# EAGLE board Carte_Mere_V2 (EAGLE 9.5.2)
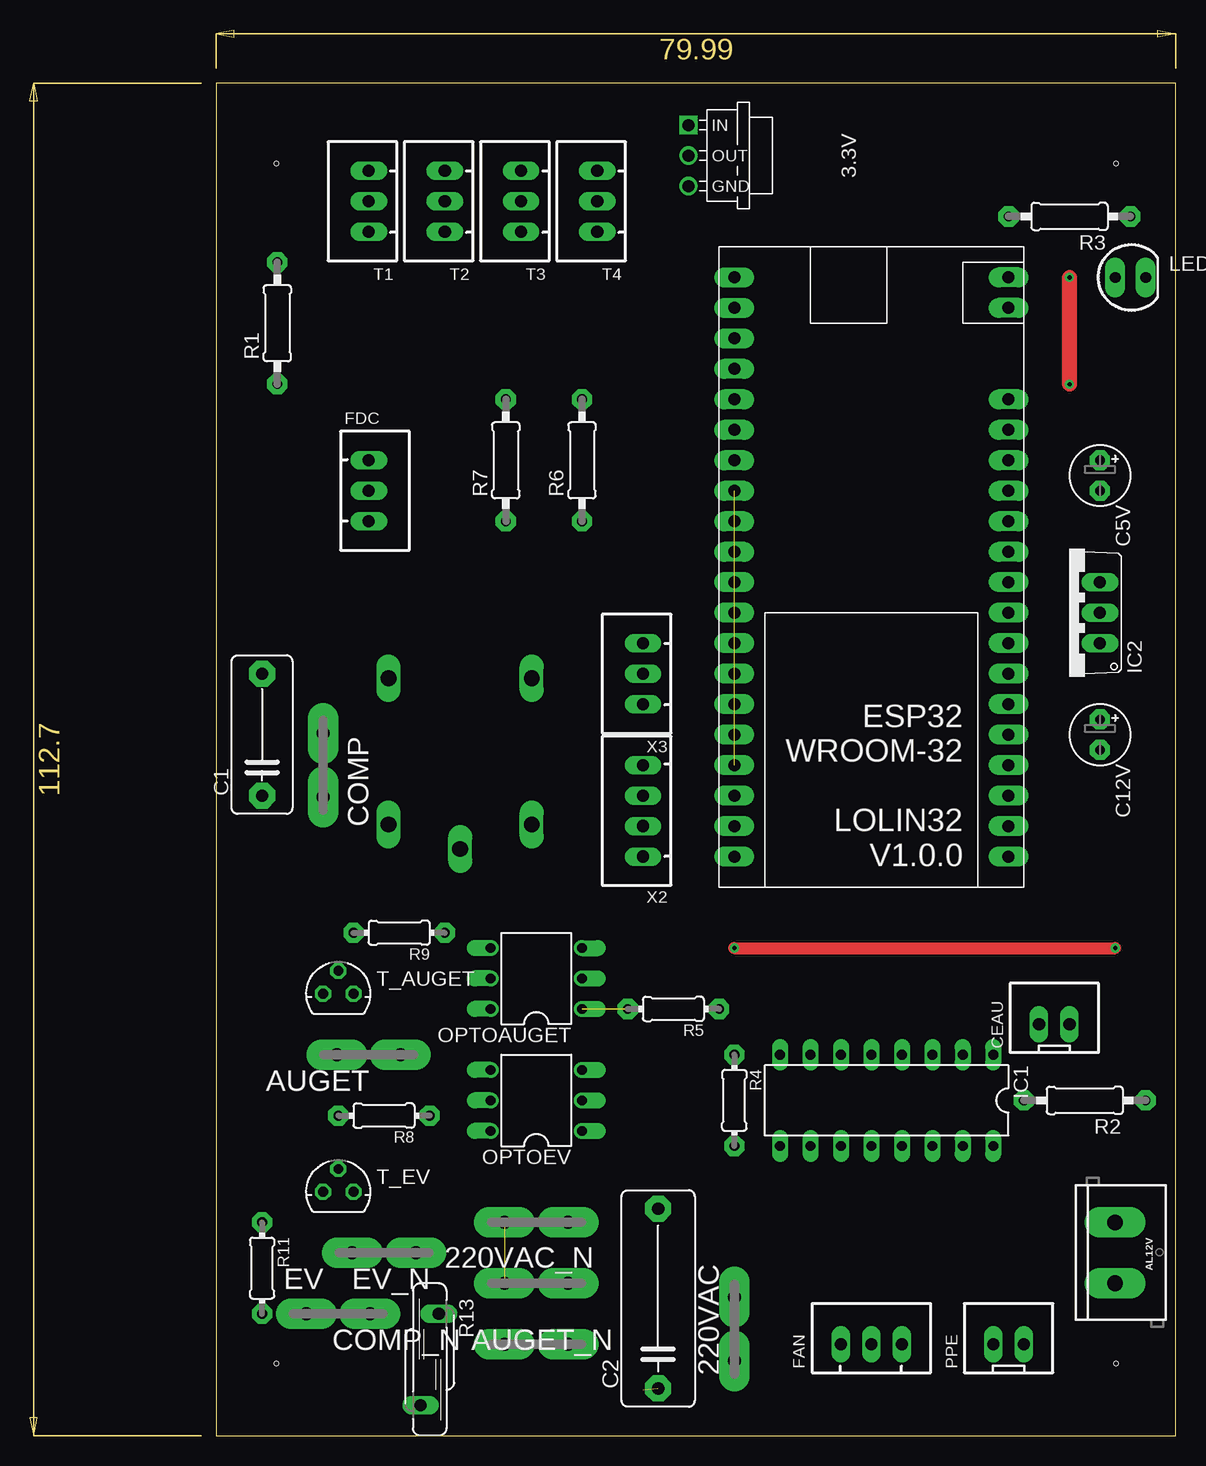
[diagram p0: board, top side]
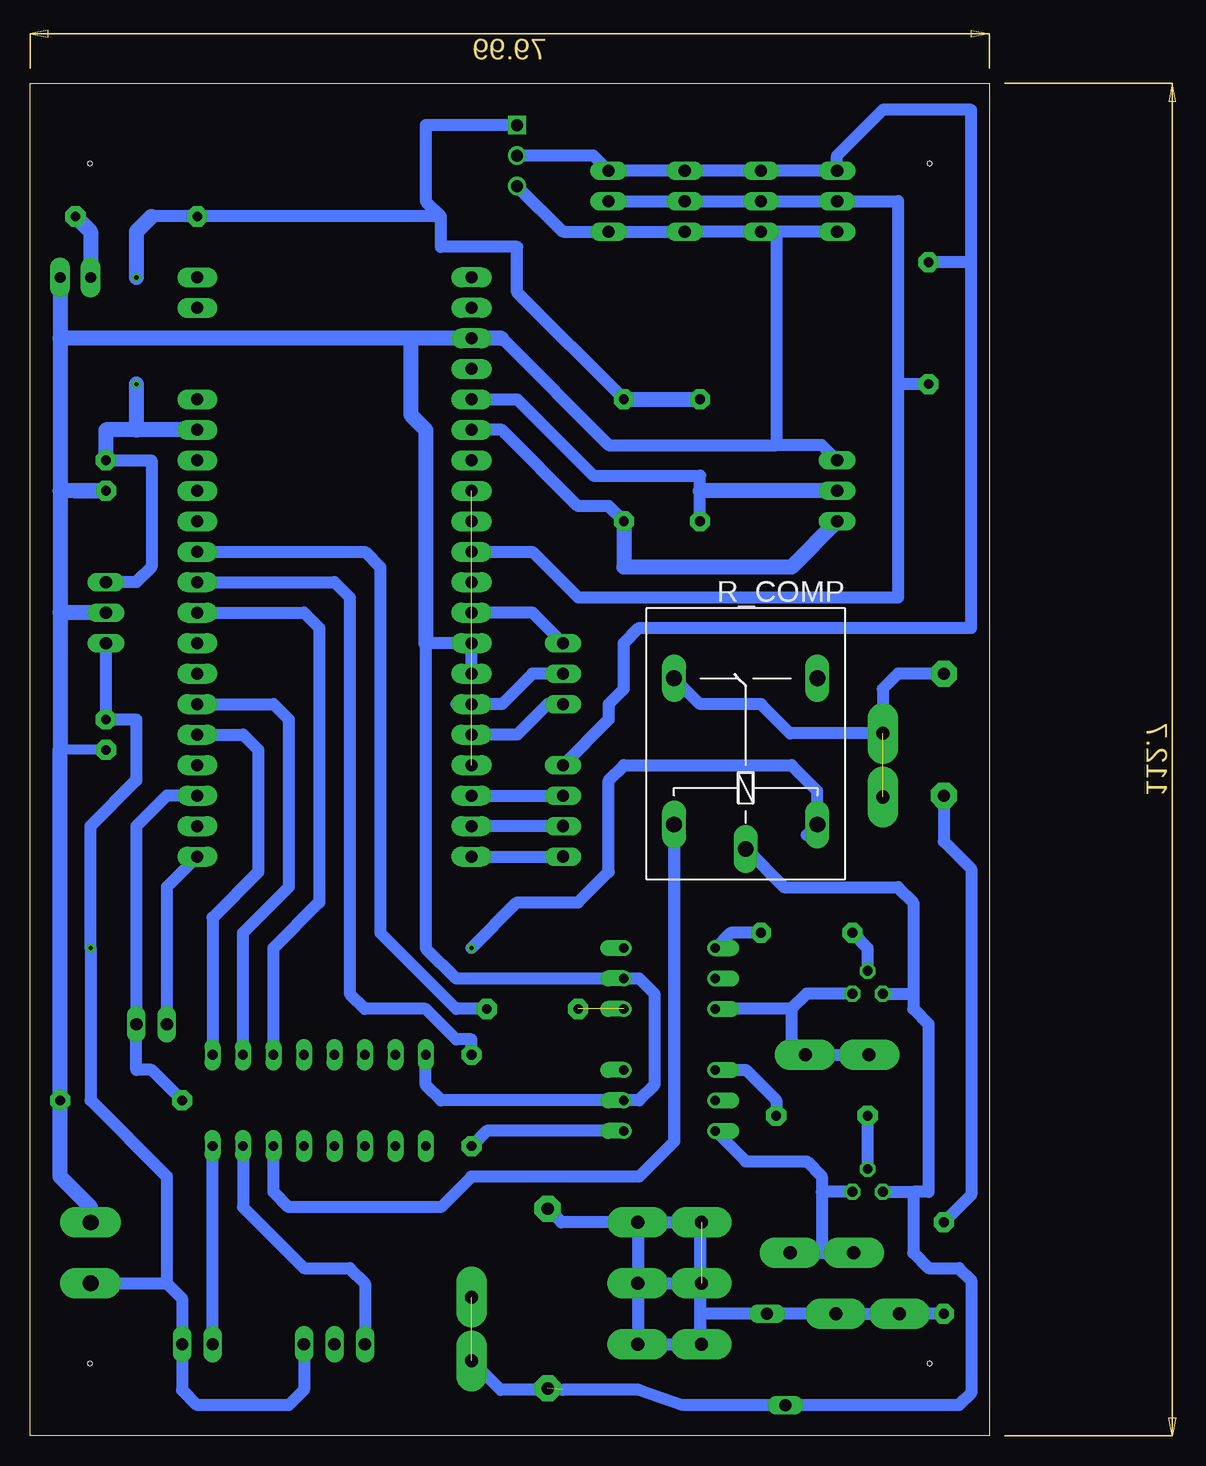
[diagram p1: board, bottom side, seen from below]

Size 79.99 x 112.7 mm. Coordinates in mm from the lower left corner, seen from the top.
Outline: 0,0 79.99,0 79.99,112.7 0,112.7 0,0
Copper layers (1*16): Top 0.035mm / dielectric 1.5mm / Bottom 0.035mm
Design rules "default": minimum track width 6mil, minimum drill 0.35mm, track to track 6mil, track to pad 6mil, pad to pad 6mil, via to via 6mil, smd to smd 6mil, copper to edge 40mil, drill to drill 6mil, minimum pad ring 10mil, minimum via ring 8mil, stop-mask expansion 4mil, vias tented up to drill 0mil, thermal gap 10mil
Holes 0.35 mm at 5,6 75,6 5,106 75,106

## Footprints (pad centres in the part's own frame; a part is rotated, then mirrored left to right if it is on the bottom)
REG-AMS1117-3P#V = drill 1 square: 1 -2.54,-5.08 | drill 1: 2 0,-5.08; 3 2.54,-5.08
F061.040 = drill 1.1 pad 2.54 long: A1 -2.65,0; A2 2.65,0
BORNIER_A_VIS_2_5.12MM = drill 1.3 pad 2.54 long: 1 -2.54,0; 2 2.54,0
C10B5 = drill 1.016 pad 2.159 octagon: 1 -5.08,0; 2 5.08,0
C15B6 = drill 1.016 pad 2.159 octagon: 1 -7.493,0; 2 7.493,0
E2,5-5 = drill 0.813 pad 1.676 octagon: V+ -1.27,0; V- 1.27,0
JST-XH-02-PACKAGE-LONG-PAD = drill 1.016 long: 1 -1.27,0; 2 1.27,0
JST-XH-03-PACKAGE-LONG-PAD = drill 1.016 long: 1 -2.54,0; 2 0,0; 3 2.54,0
DIL16 = drill 0.813 long: 1 -8.89,-3.81; 2 -6.35,-3.81; 3 -3.81,-3.81; 4 -1.27,-3.81; 5 1.27,-3.81; 6 3.81,-3.81; 7 6.35,-3.81; 8 8.89,-3.81; 9 8.89,3.81; 10 6.35,3.81; 11 3.81,3.81; 12 1.27,3.81; 13 -1.27,3.81; 14 -3.81,3.81; 15 -6.35,3.81; 16 -8.89,3.81
TO220V = drill 1.016 long: 1 -2.54,-2.54; 2 0,-2.54; 3 2.54,-2.54
LED5MM = drill 0.9 pad 1.676 long: A -1.27,0; K 1.27,0
DIL06 = drill 0.813 offset: 1 -2.54,-3.81; 2 0,-3.81; 3 2.54,-3.81; 4 2.54,3.81; 5 0,3.81; 6 -2.54,3.81
0207/10 = drill 0.813 pad 1.676 octagon: 1 -5.08,0; 2 5.08,0
0204/7 = drill 0.813 pad 1.676 octagon: 1 -3.81,0; 2 3.81,0
S10K11 = drill 1.016 long: 1 -0.762,-3.81; 2 0.762,3.81
G5LE = drill 1.321 long: 1 -7.493,-5.969; 2 -7.493,5.969; O 4.699,5.969; P -9.525,0; S 4.699,-5.969
TO92-6 = drill 0.813 octagon: A1 -1.27,0; A2 1.27,0; G 0,1.905
ESP32_LOLIN_V1.0.0 = drill 1 pad 1.676 long: 1 -11.43,24.13; 2 -11.43,21.59; 3 -11.43,19.05; 4 -11.43,16.51; 5 -11.43,13.97; 6 -11.43,11.43; 7 -11.43,8.89; 8 -11.43,6.35; 9 -11.43,3.81; 10 -11.43,1.27; 11 -11.43,-1.27; 12 -11.43,-3.81; 13 -11.43,-6.35; 14 -11.43,-8.89; 15 -11.43,-11.43; 16 -11.43,-13.97; 17 11.43,24.13; 18 11.43,21.59; 19 11.43,19.05; 20 11.43,16.51; 21 11.43,13.97; 22 11.43,11.43; 23 11.43,8.89; 24 11.43,6.35; 25 11.43,3.81; 26 11.43,1.27; 27 11.43,-1.27; 28 11.43,-3.81; 29 11.43,-6.35; 30 11.43,-8.89; 31 11.43,-11.43; 32 11.43,-13.97; 33 11.43,-16.51; 34 11.43,-19.05; 35 11.43,-21.59; 36 11.43,-24.13; + -11.43,-21.59; - -11.43,-24.13
JST-XH-04-PACKAGE-LONG-PAD = drill 1.016 long: 1 -3.81,0; 2 -1.27,0; 3 1.27,0; 4 3.81,0

## Placement (x,y rotation side)
3.3V  REG-AMS1117-3P-3.3V#V  [REG-AMS1117-3P#V]  44.45,106.68 270 top
220VAC  PIN2F061.040  [F061.040]  43.18,8.89 90 top
220VAC_N  PIN2F061.040  [F061.040]  26.67,17.78 0 top
AL12V  [BORNIER_A_VIS_2_5.12MM]  74.93,15.24 270 top
AUGET  PIN2F061.040  [F061.040]  12.7,31.75 180 top
AUGET_N  PIN2F061.040  [F061.040]  26.67,12.7 180 top
C1  47nF  [C10B5]  3.81,58.42 90 top
C2  0.1µF  [C15B6]  36.83,11.43 90 top
C5V  47µF  [E2,5-5]  73.66,80.01 270 top
C12V  47µF  [E2,5-5]  73.66,58.42 270 top
CEAU  JST-XH-02-PIN-LONG-PAD  [JST-XH-02-PACKAGE-LONG-PAD]  69.85,34.29 0 top
COMP  PIN2F061.040  [F061.040]  8.89,55.88 90 top
COMP_N  PIN2F061.040  [F061.040]  26.67,7.62 180 top
EV  PIN2F061.040  [F061.040]  13.97,15.24 180 top
EV_N  PIN2F061.040  [F061.040]  10.16,10.16 180 top
FAN  JST-XH-03-PIN-LONG-PAD  [JST-XH-03-PACKAGE-LONG-PAD]  54.61,7.62 0 top
FDC  JST-XH-03-PIN-LONG-PAD  [JST-XH-03-PACKAGE-LONG-PAD]  12.7,78.74 270 top
IC1  ULN2003AN  [DIL16]  55.88,27.94 180 top
IC2  7805TV  [TO220V]  71.12,68.58 90 top
LED1  [LED5MM]  76.2,96.52 0 top
OPTOAUGET  MOC3041M  [DIL06]  26.67,38.1 90 top
OPTOEV  MOC3041M  [DIL06]  26.67,27.94 90 top
PPE  JST-XH-02-PIN-LONG-PAD  [JST-XH-02-PACKAGE-LONG-PAD]  66.04,7.62 0 top
R1  4.7K  [0207/10]  5.08,92.71 90 top
R2  10K  [0207/10]  72.39,27.94 180 top
R3  330R  [0207/10]  71.12,101.6 180 top
R4  220R  [0204/7]  43.18,27.94 270 top
R5  220R  [0204/7]  38.1,35.56 180 top
R6  4.7K  [0207/10]  30.48,81.28 90 top
R7  4.7K  [0207/10]  24.13,81.28 90 top
R8  220R  [0204/7]  13.97,26.67 180 top
R9  220R  [0204/7]  15.24,41.91 180 top
R11  220R  [0204/7]  3.81,13.97 270 top
R13  S10K11  [S10K11]  17.78,6.35 180 top
R_COMP  G5L  [G5LE]  20.32,58.42 90 bottom
T1  JST-XH-03-PIN-LONG-PAD  [JST-XH-03-PACKAGE-LONG-PAD]  12.7,102.87 90 top
T2  JST-XH-03-PIN-LONG-PAD  [JST-XH-03-PACKAGE-LONG-PAD]  19.05,102.87 90 top
T3  JST-XH-03-PIN-LONG-PAD  [JST-XH-03-PACKAGE-LONG-PAD]  25.4,102.87 90 top
T4  JST-XH-03-PIN-LONG-PAD  [JST-XH-03-PACKAGE-LONG-PAD]  31.75,102.87 90 top
T_AUGET  TRIAC_TO92-1  [TO92-6]  10.16,36.83 0 top
T_EV  TRIAC_TO92-1  [TO92-6]  10.16,20.32 0 top
U$1  ESP32_LOLIN_V1.0.0  [ESP32_LOLIN_V1.0.0]  54.61,72.39 180 top
X2  JST-XH-04-PIN-LONG-PAD  [JST-XH-04-PACKAGE-LONG-PAD]  35.56,52.07 90 top
X3  JST-XH-03-PIN-LONG-PAD  [JST-XH-03-PACKAGE-LONG-PAD]  35.56,63.5 90 top

## Library data of the parts
3.3V = 05-arduino_etc
220VAC 220VAC_N AUGET AUGET_N COMP COMP_N EV EV_N = con-faston; OC_FARNELL: unknown; OC_NEWARK: unknown
AL12V = _Remy; SF_SKU: PRT-08432
C1 C2 C5V C12V IC2 R4 R5 R8 R9 R11 = 00-LIVIO
CEAU FAN FDC PPE T1-T4 X2 X3 = con-JST XH Connectors v1-0
IC1 = uln-udn
LED1 R1-R3 R6 R7 U$1 = _Remy
OPTOAUGET OPTOEV = optocoupler; MF: FAIRCHILD SEMICONDUCTOR; MPN: MOC3041M; OC_FARNELL: 1086677; OC_NEWARK: 78K6090
R13 = varistor
R_COMP = relay; OC_FARNELL: unknown; OC_NEWARK: unknown
T_AUGET T_EV = 04_Remy

## Nets
0V: 3.3V.3 AL12V.1 C5V.V- C12V.V- FDC.1 IC1.8 IC2.2 LED1.K OPTOAUGET.2 OPTOEV.2 R2.1 T1.1 T2.1 T3.1 T4.1 U$1.23 U$1.24 U$1.34
3.3V: CEAU.1 U$1.1
3V3: U$1.20 U$1.29
+5V: 3.3V.1 C5V.V+ IC2.3 R3.2 R6.2 R7.2 U$1.15
+12V: AL12V.2 C12V.V+ FAN.3 IC2.1 PPE.2 R_COMP.1
BAT+: U$1.+
BAT-: U$1.-
GND: U$1.16
N$1: U$1.21 X3.1
N$2: EV.A1 EV.A2 OPTOEV.6 T_EV.A2
N$3: IC1.1 U$1.5
N$4: FDC.2 R7.1 U$1.32
N$5: IC1.2 U$1.6
N$6: C1.1 R11.1
N$7: LED1.A R3.1
N$8: IC1.16 PPE.1
N$9: FAN.1 IC1.15
N$10: IC1.14 R_COMP.2
N$11: IC1.3 U$1.9
N$12: R4.1 U$1.10
N$13: R5.1 U$1.11
N$14: IC1.13
N$15: OPTOEV.1 R4.2
N$16: AUGET.A1 AUGET.A2 OPTOAUGET.6 T_AUGET.A2
N$17: U$1.22 X3.2
N$18: OPTOEV.4 R8.1
N$19: C1.2 COMP.A1 COMP.A2 R_COMP.O
N$20: IC1.12
N$21: OPTOAUGET.1 R5.2
N$22: U$1.17 X2.1
N$23: FDC.3 R6.1 U$1.31
N$24: U$1.18 X2.2
N$25: U$1.19 X2.3
N$27: U$1.25 X3.3
N$28: CEAU.2 R2.2 U$1.3
N$29: OPTOAUGET.4 R9.1
N$30: R1.1 T1.2 T2.2 T3.2 T4.2 U$1.27
N$31: R8.2 T_EV.G
N$32: R9.2 T_AUGET.G
N$33: 220VAC.A1 220VAC.A2 C2.1 R13.2 R_COMP.P T_AUGET.A1 T_EV.A1
N$35: 220VAC_N.A1 220VAC_N.A2 AUGET_N.A1 AUGET_N.A2 C2.2 COMP_N.A1 COMP_N.A2 EV_N.A1 EV_N.A2 R11.2 R13.1
VCC: 3.3V.2 R1.2 T1.3 T2.3 T3.3 T4.3 X2.4

## Tracks (layer width: path | path; a pad name or v marks a point on that pad's centre or on a via)
0V
  Bottom 0.813: C12V.V- 77.47,57.15
  Bottom 1.016: 40.64,91.44 31.75,82.55 17.78,82.55 | 17.78,82.55 17.78,100.33 T2.1 | FDC.1 13.97,82.55 17.78,82.55 | U$1.23 U$1.24 46.99,66.04 46.99,40.64 44.45,38.1 OPTOAUGET.2 29.21,38.1 27.94,36.83 27.94,29.21 29.21,27.94 OPTOEV.2 45.72,27.94 46.99,29.21 IC1.8 | T2.1 T3.1 T4.1 | T4.1 35.56,100.33 3.3V.3 | T4.1 30.48,100.33 | T1.1 T2.1
  Bottom 1.27: 40.64,91.44 U$1.34 48.26,91.44 | 48.26,91.44 48.26,85.09 46.99,83.82 46.99,66.04 | 76.2,78.74 C5V.V- 77.47,78.74 | 76.2,68.58 IC2.2 77.47,68.58 | 48.26,91.44 77.47,91.44 | 77.47,91.44 77.47,78.74 | 77.47,78.74 77.47,68.58 | 77.47,68.58 77.47,57.15 R2.1 77.47,21.59 74.93,19.05 AL12V.1 | LED1.K 77.47,91.44
3.3V
  Bottom 1.016: U$1.1 68.58,45.72 CEAU.1
3V3  (1 unrouted)
+5V  (via drill 0.35)
  Top 1.27: v71.12,96.52 v71.12,87.63
  Bottom 1.016: 69.85,101.6 R3.2 45.72,101.6 | R6.2 39.37,95.25 39.37,99.06 45.72,99.06 45.72,101.6 | C5V.V+ 69.85,81.28 69.85,72.39 71.12,71.12 IC2.3 | 3.3V.1 46.99,109.22 46.99,102.87 45.72,101.6
  Bottom 1.27: C5V.V+ 73.66,83.82 71.12,83.82 | v71.12,96.52 71.12,100.33 69.85,101.6 | U$1.15 71.12,83.82 | v71.12,87.63 71.12,83.82 | R6.2 R7.2
+12V  (via drill 0.35)
  Top 1.016: v43.18,40.64 v74.93,40.64
  Bottom 1.016: v43.18,40.64 39.37,44.45 34.29,44.45 31.75,46.99 31.75,54.61 30.48,55.88 16.51,55.88 14.35,53.72 R_COMP.1 15.24,50.04 | FAN.3 57.15,3.81 58.42,2.54 66.04,2.54 67.31,3.81 PPE.2 67.31,11.43 68.58,12.7 | AL12V.2 68.58,12.7 | IC2.1 C12V.V+ 71.12,59.69 71.12,54.61 74.93,50.8 v74.93,40.64 74.93,27.94 68.58,21.59 68.58,12.7
N$1
  Bottom 1.016: X3.1 36.83,60.96 39.37,58.42 U$1.21
N$2
  Bottom 1.016: T_EV.A2 13.97,20.32 | 13.97,20.32 13.97,15.24 | 13.97,15.24 EV.A2 | EV.A1 13.97,15.24 | OPTOEV.6 20.32,22.86 15.24,22.86 13.97,21.59 13.97,20.32
N$3
  Bottom 1.016: U$1.5 62.23,58.42 60.96,57.15 60.96,46.99 64.77,43.18 IC1.1
N$4
  Bottom 1.016: R7.1 24.13,78.74 24.13,80.01 33.02,80.01 39.37,86.36 U$1.32
  Bottom 1.27: FDC.2 24.13,78.74
N$5
  Bottom 1.016: U$1.6 59.69,60.96 58.42,59.69 58.42,45.72 62.23,41.91 IC1.2
N$6
  Bottom 1.016: C1.1 3.81,49.53 1.52,47.24 1.52,20.07 R11.1
N$7
  Bottom 1.27: R3.1 74.93,100.33 LED1.A
N$8
  Bottom 1.016: PPE.1 IC1.16
N$9
  Bottom 1.016: IC1.15 62.23,19.05 57.15,13.97 53.34,13.97 52.07,12.7 FAN.1
N$10
  Bottom 1.016: R_COMP.2 26.29,24.51 29.21,21.59 43.18,21.59 45.72,19.05 58.42,19.05 59.69,20.32 IC1.14
N$11
  Bottom 1.016: U$1.9 57.15,68.58 55.88,67.31 55.88,44.45 59.69,40.64 IC1.3
N$12
  Bottom 1.016: U$1.10 54.61,71.12 53.34,69.85 53.34,36.83 52.07,35.56 46.99,35.56 44.45,33.02 43.18,33.02 R4.1
N$13
  Bottom 1.016: U$1.11 52.07,73.66 50.8,72.39 50.8,41.91 44.45,35.56 R5.1
N$15
  Bottom 1.016: OPTOEV.1 41.91,25.4 R4.2
N$16
  Bottom 1.016: T_AUGET.A2 15.24,36.83 16.51,35.56 | 16.51,35.56 OPTOAUGET.6 | 16.51,35.56 16.51,32.91 AUGET.A1 AUGET.A2
N$17
  Bottom 1.016: X3.2 38.1,63.5 40.64,60.96 U$1.22 44.45,60.96
N$18
  Bottom 1.016: OPTOEV.4 20.32,30.48 17.78,27.94 R8.1
N$19  (1 unrouted)
  Bottom 1.016: R_COMP.O 24.13,60.96 19.05,60.96 16.62,58.53 COMP.A2 8.89,62.23 7.62,63.5 C1.2
N$21  (1 unrouted)
N$22
  Bottom 1.016: U$1.17 X2.1
N$23
  Bottom 1.016: R6.1 31.75,77.47 34.29,77.47 40.64,83.82 U$1.31
  Bottom 1.27: R6.1 30.48,72.39 16.51,72.39 FDC.3
N$24
  Bottom 1.016: X2.2 U$1.18
N$25
  Bottom 1.016: U$1.19 X2.3
N$27
  Bottom 1.016: X3.3 38.1,68.58 U$1.25
N$28
  Bottom 1.016: R2.2 69.85,30.48 71.12,30.48 CEAU.2 | U$1.3 68.58,53.34 71.12,50.8 CEAU.2 | CEAU.2 71.12,35.56
N$29
  Bottom 1.016: R9.1 21.59,41.91 OPTOAUGET.4
N$30
  Bottom 1.016: 7.62,87.63 7.62,102.87 T1.2 T2.2 T3.2 T4.2 | 7.62,87.63 7.62,69.85 34.29,69.85 38.1,73.66 U$1.27 | R1.1 7.62,87.63
N$31
  Bottom 1.016: R8.2 T_EV.G
N$32
  Bottom 1.016: R9.2 10.16,40.64 T_AUGET.G
N$33  (2 unrouted)
  Bottom 1.016: 35.56,3.81 29.21,3.81 25.51,2.54 17.78,2.54 R13.2 2.54,2.54 1.52,3.56 1.52,12.95 2.54,13.97 5.08,13.97 6.35,15.24 6.35,20.32 | C2.1 36.96,3.81 40.75,3.81 220VAC.A1 | R_COMP.P 17.14,45.72 7.62,45.72 6.35,44.45 6.35,36.83 | T_EV.A1 6.35,20.32 | 6.35,20.32 5.08,20.32 5.08,34.29 6.35,35.56 6.35,36.83 | T_AUGET.A1 6.35,36.83
N$35  (1 unrouted)
  Bottom 1.016: R11.2 EV_N.A2 EV_N.A1 R13.1 24.13,10.16 | C2.2 35.69,17.78 220VAC_N.A2 | 24.13,10.16 24.13,7.73 COMP_N.A2 COMP_N.A1 220VAC_N.A2 | 24.13,12.7 24.13,17.67 220VAC_N.A1 220VAC_N.A2 | 24.13,12.7 24.13,10.16 | AUGET_N.A1 24.13,12.7
VCC
  Bottom 1.016: 1.52,97.79 1.52,67.31 29.21,67.31 30.48,66.04 30.48,62.23 31.75,60.96 31.75,59.69 X2.4 | 1.52,97.79 1.52,110.49 8.89,110.49 12.7,106.68 T1.3 T2.3 T3.3 T4.3 33.02,106.68 3.3V.2 | 1.52,97.79 R1.2